# Altium PCB RightSideLeftBox.PcbDoc
Units mil, origin at the board's own origin, x right, y up, seen from the top; angles counter-clockwise.
Board outline 11700 x 6800 mil, 4 copper layers (Top Layer, Layer 1, Layer 2, Bottom Layer), stack 23.756 mil thick; 51 components, 69 nets, 272 pads, 13 vias.
Unrouted connection lines stored in the file: 36.
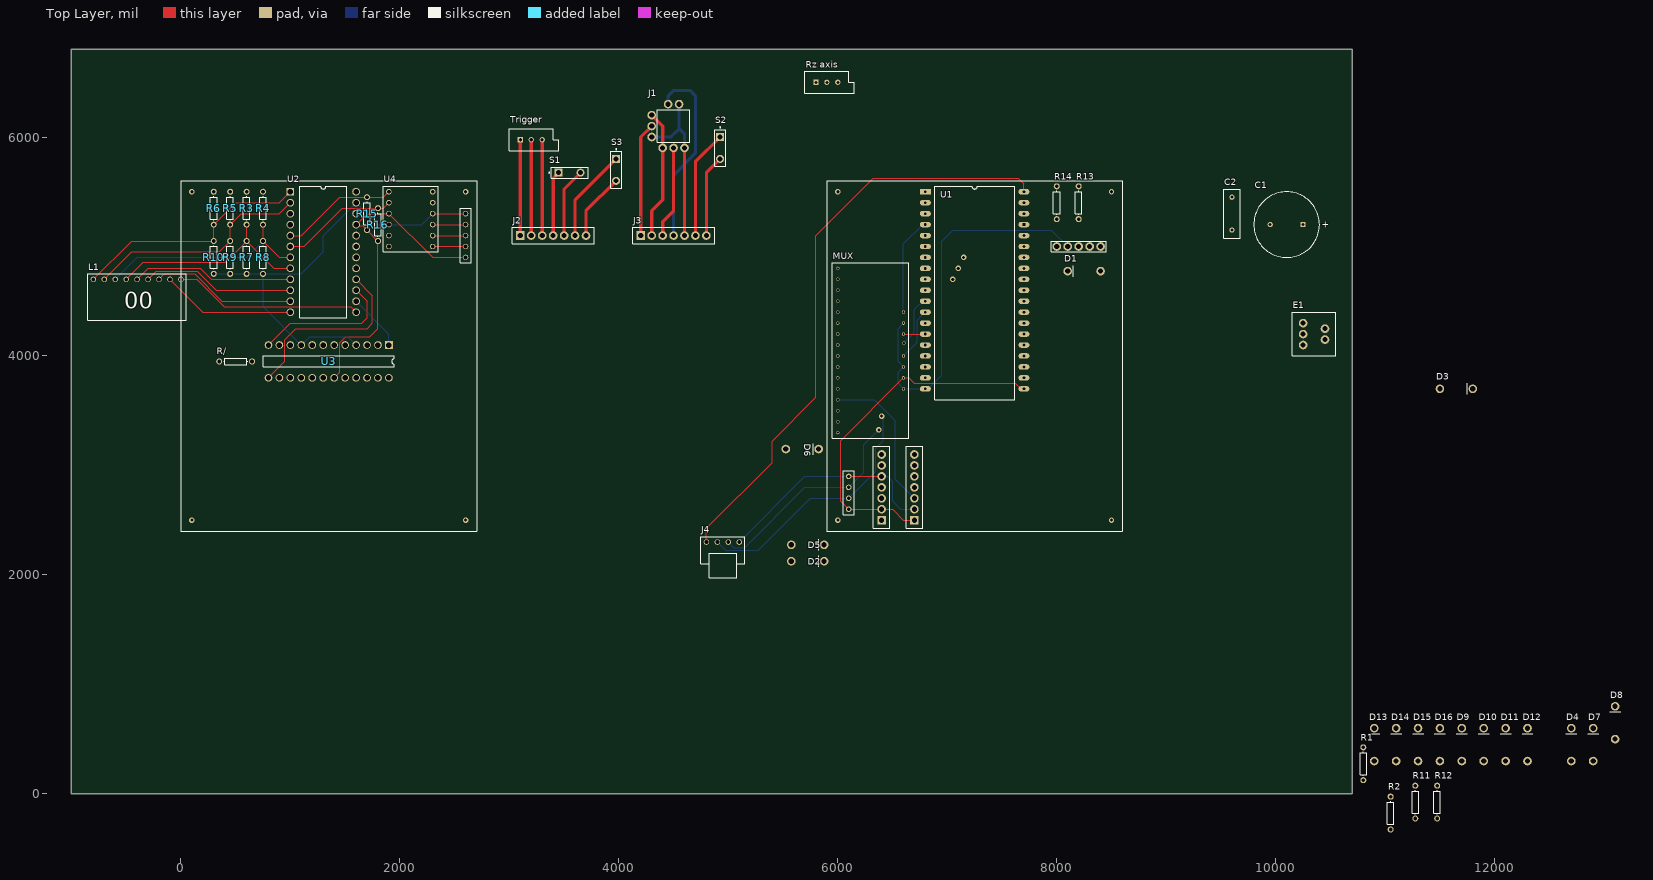
[diagram p0: Top Layer view]
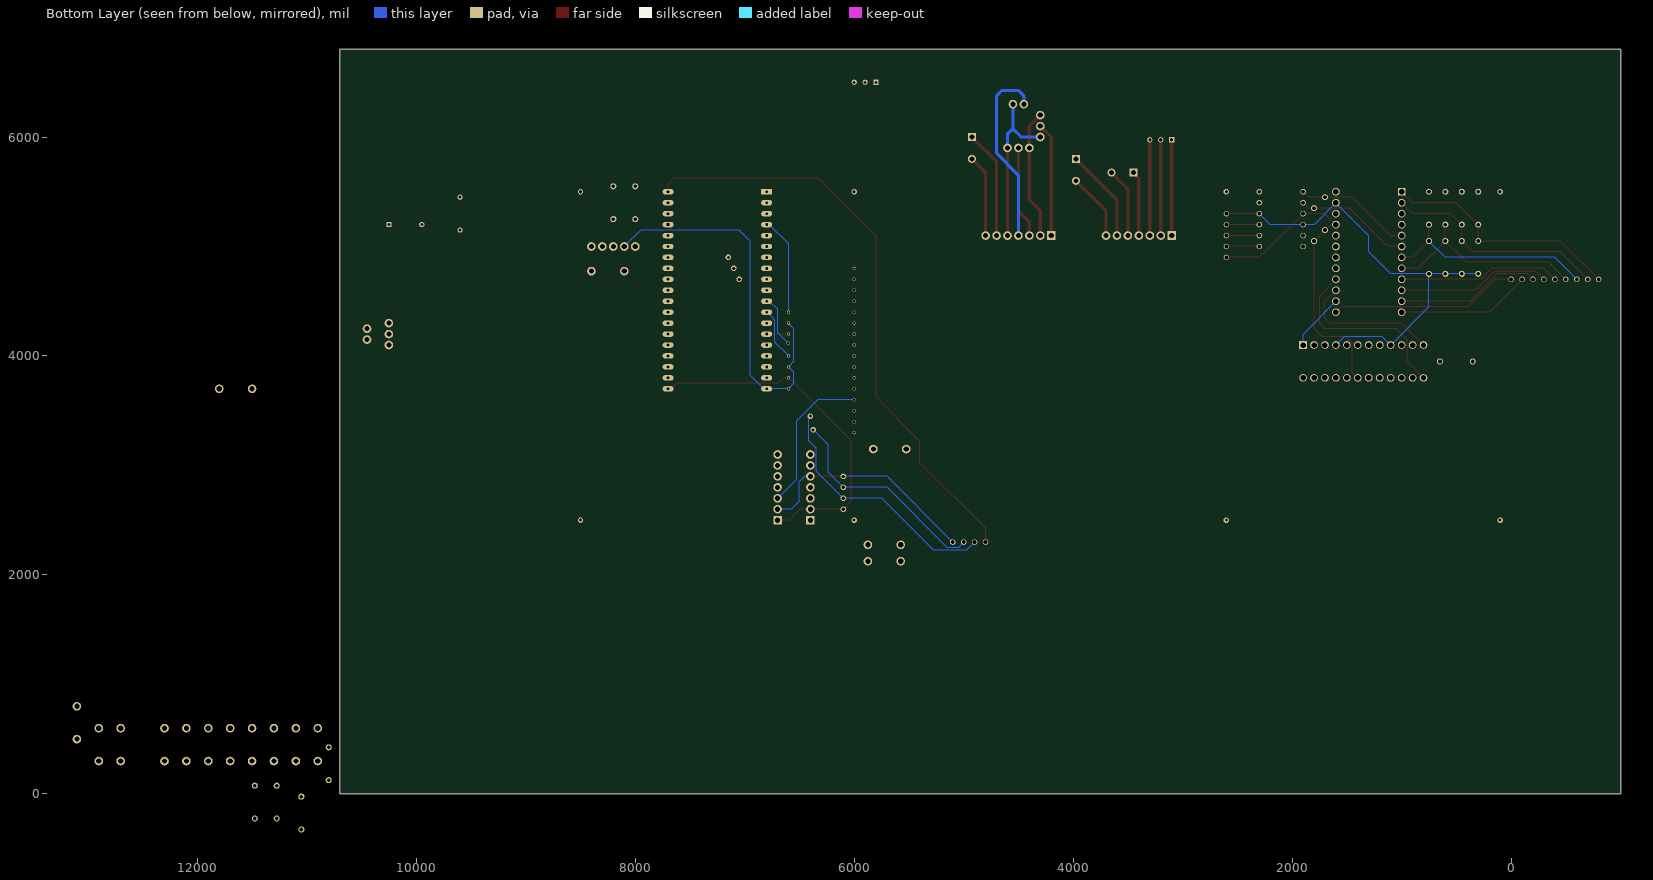
[diagram p1: Bottom Layer view, seen from below]
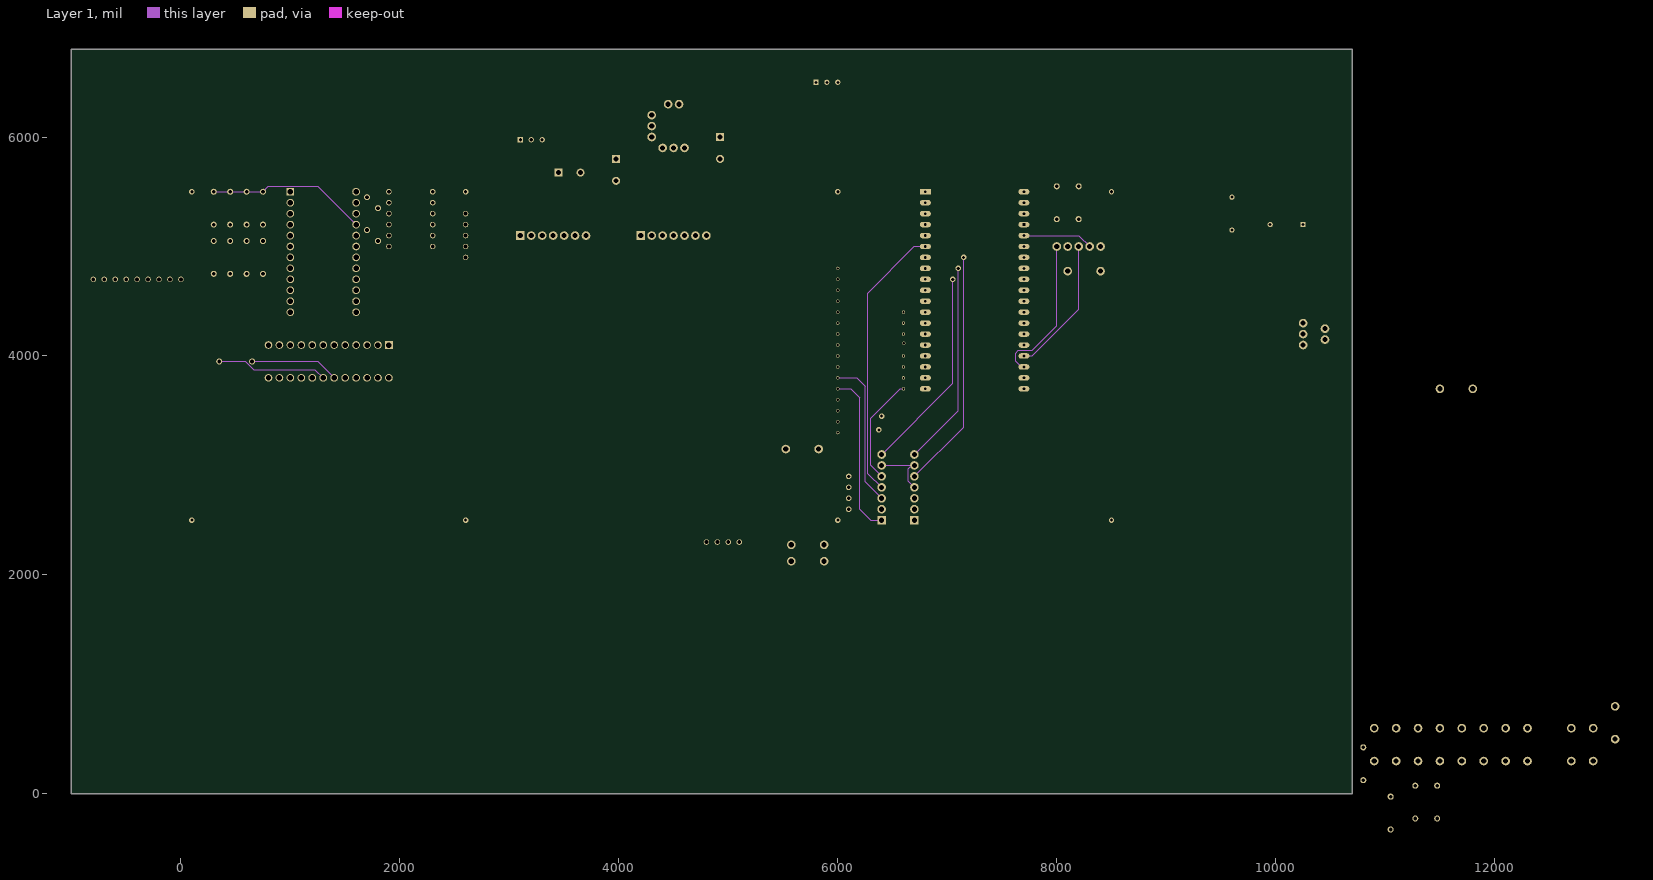
[diagram p2: Layer 1]
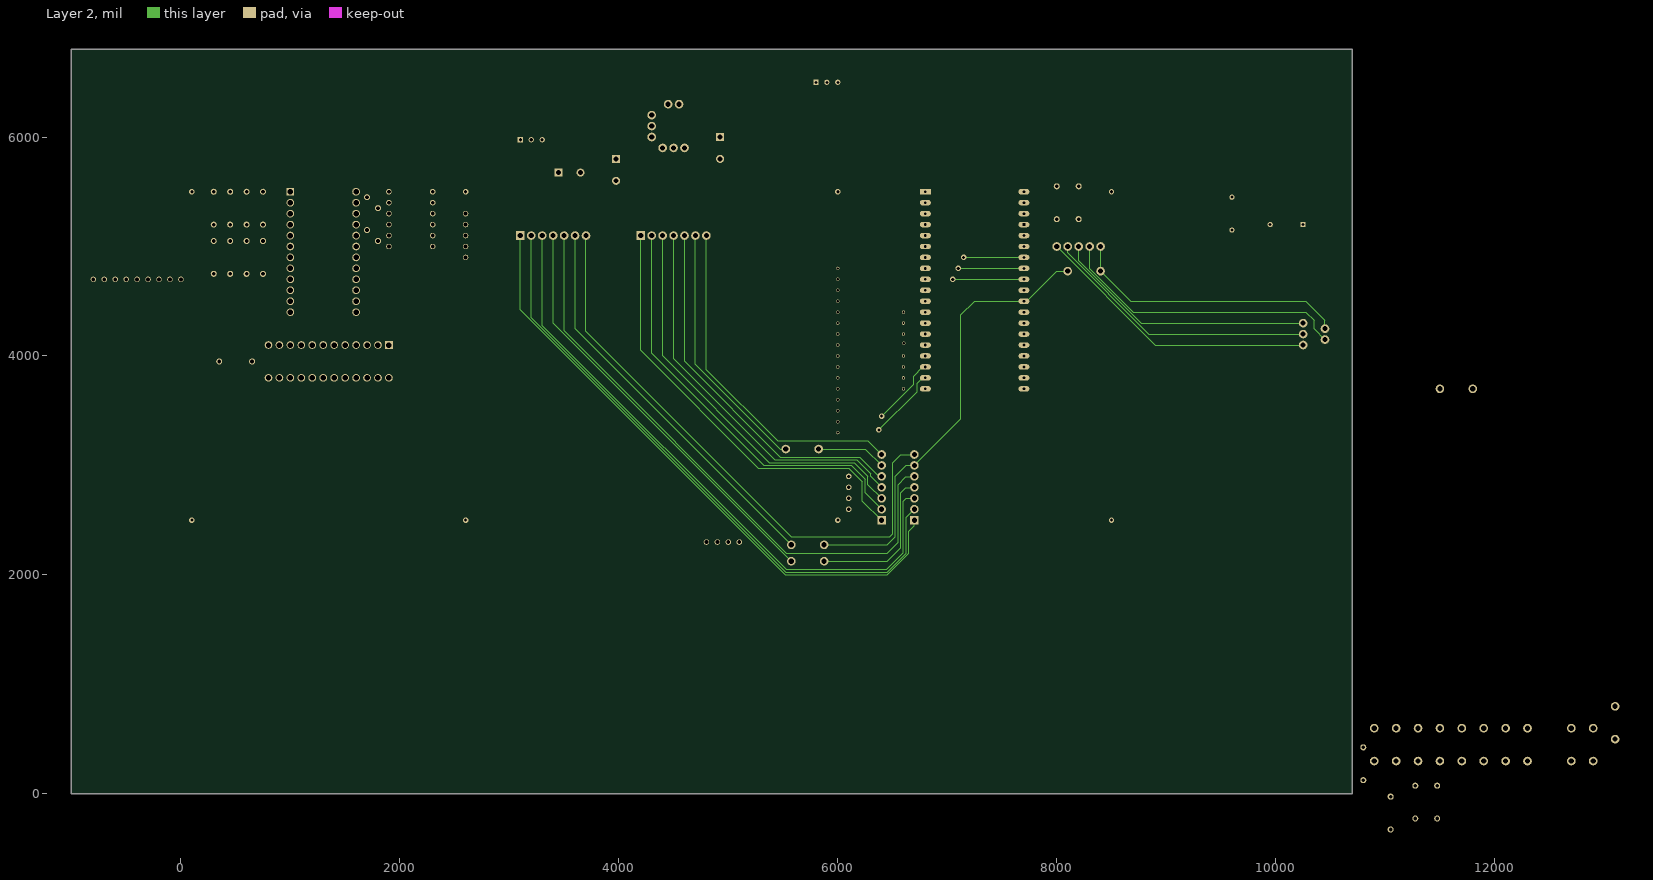
[diagram p3: Layer 2]

## Layer stack, top to bottom
Top Solder: solder mask 0.4, Solder Resist, Dk 3.5
Top Layer: signal copper 1.4
Dielectric 2: prepreg 2.8, PP-006, Dk 4.1
Layer 1: signal copper 1.378
Dielectric 1: dielectric 12.6, FR-4, Dk 4.8
Layer 2: signal copper 1.378
Dielectric 3: prepreg 2.8, PP-006, Dk 4.1
Bottom Layer: signal copper 1.4
Bottom Solder: solder mask 0.4, Solder Resist, Dk 3.5

## Board outline
-1000,0 10700,0 10700,6800 -1000,6800

## Design rules (kind name [scope] priority, off if disabled: settings)
Clearance [All] p1: gap=10 ignorepadtopadclearanceinfootprint=FALSE except(0: Arc-Hole Track-Hole SMDPad-Hole THPad-Hole Via-Hole Fill-Hole Poly-Hole Region-Hole Text-Hole)
PolygonConnect [All] p1: connectstyle=Relief reliefconductorwidth=10 reliefentries=4 polygonreliefangle="90 Angle" airgapwidth=10
RoomDefinition RightSide [InComponentClass('RightSide')] p1 off: confinementstyle=ConfineIn formatcopy=TRUE lockcomponents=FALSE outline -1000,-1000 -700,-1000 -700,-800 -1000,-800
RoutingVias [All] p1: holewidth=28 width=50 viastyle="Through Hole" minholewidth=28 minwidth=50 maxholewidth=28 maxwidth=50
SolderMaskExpansion [All] p1: expansion=4 istentingtop=FALSE
Width [All] p1: maxlimit=100 minlimit=10 preferedwidth=30 minimp=50.000000 maximp=50.000000 favimp=50.000000
30 further rules are at their usual default settings.

## Components (designator, comment, footprint, x,y, rotation, side; value= is the part's Value field where it differs from the comment)
C1 "Cap Pol1" RB7.6-15 10100,5200 r0 top
C2 "Cap" RAD-0.3 9600,5300 r90 top value=100pF
D1 "Diode" Diode_300mil 8400,4775 r180 top
D2 "Diode" Diode_300mil 5575,2125 r0 top
D3 "Diode" Diode_300mil 11500,3700 r0 top
D4 "Diode" Diode_300mil 12700,300 r90 top
D5 "Diode" Diode_300mil 5575,2275 r0 top
D6 "Diode" Diode_300mil 5525,3150 r0 top
D7 "Diode" Diode_300mil 12900,300 r90 top
D8 "Diode" Diode_300mil 13100,500 r90 top
D9 "Diode" Diode_300mil 11700,300 r90 top
D10 "Diode" Diode_300mil 11900,300 r90 top
D11 "Diode" Diode_300mil 12100,300 r90 top
D12 "Diode" Diode_300mil 12300,300 r90 top
D13 "Diode" Diode_300mil 10900,300 r90 top
D14 "Diode" Diode_300mil 11100,300 r90 top
D15 "Diode" Diode_300mil 11300,300 r90 top
D16 "Diode" Diode_300mil 11500,300 r90 top
E1 "EC11" Encoder 10250,4200 r270 top
J1 "Mini joystick" MiniJoyStick 4500,6100 r0 top
J2 "Header7Pin" Header7Pin 3100,5100 r90 top
J3 "Header7Pin" Header7Pin 4200,5100 r90 top
J4 "USB Connector" USB-B 4800,2300 r0 top
L1 "LCD Display" "LCD DISPLAY" -800,4700 r0 top
MUX "CD74HC4067" CD74HC4067 6000,4800 r0 top locked
R1 "Res1" AXIAL-0.3 10800,275 r90 top value=1K
R2 "Res1" AXIAL-0.3 11050,-175 r90 top value=1K
R3 "Res1" AXIAL-0.3 600,5350 r90 top value=10K
R4 "Res1" AXIAL-0.3 750,5350 r90 top value=10K
R5 "Res1" AXIAL-0.3 450,5350 r90 top locked value=10K
R6 "Res1" AXIAL-0.3 300,5350 r90 top locked value=10K
R7 "Res1" AXIAL-0.3 600,4900 r90 top value=10K
R8 "Res1" AXIAL-0.3 750,4900 r90 top value=10K
R9 "Res1" AXIAL-0.3 450,4900 r90 top locked value=10K
R10 "Res1" AXIAL-0.3 300,4900 r90 top locked value=10K
R11 "Res1" AXIAL-0.3 11275,-75 r90 top value=1K
R12 "Res1" AXIAL-0.3 11475,-75 r90 top value=1K
R13 "Res1" AXIAL-0.3 8200,5400 r90 top value=1K
R14 "Res1" AXIAL-0.3 8000,5400 r90 top value=1K
R15 "Res1" AXIAL-0.3 1700,5300 r270 top locked value=1K
R16 "Res1" AXIAL-0.3 1800,5200 r270 top locked value=1K
R/ "Res1" AXIAL-0.3 500,3950 r0 top value=9.53K
"Rz axis" "RPot" VR5 5900,6500 r0 top value=1K
S1 "SW-PB" SPST-2 3550,5675 r0 top
S2 "SW-PB" SPST-2 4925,5900 r270 top
S3 "SW-PB" SPST-2 3975,5700 r270 top
Trigger "RPot" VR5 3200,5975 r0 top value=1K
U1 "NodeMCU-32S" DIP38 6800,5500 r0 top locked
U2 "Pro Micro" "DIP24 x 600mil" 1000,5500 r0 top locked
U3 "MAX7219" "DIP24 x 300mil" 1900,4100 r270 top locked
U4 "LevelShifter" LevelShifter 1900,5000 r90 top locked

## Footprints (in the part's own frame and the unit in brackets; to place one, negate y for a bottom-side part, rotate by r counter-clockwise, add the part's x,y. Pads: shape width x height; smd on the part's side, far side on the other; paste and mask are expansions set on the pad)
AXIAL-0.3 [mm] "Axial Device, Thru-Hole; 2 Leads; 0.3 in Pin Spacing"
  round 1.4 hole 0.85: 1(-3.81,0) 2(3.81,0)
  silkscreen extent -2.77,-0.76 2.77,0.76
CD74HC4067 [mil] "MUX"
  round 30 hole 20: 1(600,-400) 2(0,-800) 3(0,-900) 4(0,-1000) 5(0,-1100) 6(0,-1200) 7(0,-1300) 8(0,-1400) 9(0,-1500) 10(600,-800) 11(602.44,-683.24) 12(600,-1100) 13(600,-500) 14(600,-600) 15(600,-900) 16(0,0) 17(0,-100) 18(0,-200) 19(0,-300) 20(0,-400) 21(0,-500) 22(0,-600) 23(0,-700) 24(600,-1000)
  silkscreen extent -50,-1550 650,50
Diode_300mil [mm]
  round 2 hole 1.2: 1(0,0) 2(7.62,0)
  silkscreen extent 6.35,-1.27 6.35,1.27
"DIP24 x 300mil" [mil]
  rect 70x70 hole 50: 1(0,0)
  round 70 hole 50: 2(0,-100) 3(0,-200) 4(0,-300) 5(0,-400) 6(0,-500) 7(0,-600) 8(0,-700) 9(0,-800) 10(0,-900) 11(0,-1000) 12(0,-1100) 13(300,-1100) 14(300,-1000) 15(300,-900) 16(300,-800) 17(300,-700) 18(300,-600) 19(300,-500) 20(300,-400) 21(300,-300) 22(300,-200) 23(300,-100) 24(300,0)
  silkscreen extent 100,-1150 200,50
"DIP24 x 600mil" [mil]
  rect 70x70 hole 50: 1(0,0)
  round 70 hole 50: 2(0,-100) 3(0,-200) 4(0,-300) 5(0,-400) 6(0,-500) 7(0,-600) 8(0,-700) 9(0,-800) 10(0,-900) 11(0,-1000) 12(0,-1100) 13(600,-1100) 14(600,-1000) 15(600,-900) 16(600,-800) 17(600,-700) 18(600,-600) 19(600,-500) 20(600,-400) 21(600,-300) 22(600,-200) 23(600,-100) 24(600,0)
  silkscreen extent 85,-1150 515,50
DIP38 [mil]
  rect 100x50 hole 25: 1(0,0)
  oval 100x50 hole 25: 2(0,-100) 3(0,-200) 4(0,-300) 5(0,-400) 6(0,-500) 7(0,-600) 8(0,-700) 9(0,-800) 10(0,-900) 11(0,-1000) 12(0,-1100) 13(0,-1200) 14(0,-1300) 15(0,-1400) 16(0,-1500) 17(0,-1600) 18(0,-1700) 19(0,-1800) 20(900,-1800) 21(900,-1700) 22(900,-1600) 23(900,-1500) 24(900,-1400) 25(900,-1300) 26(900,-1200) 27(900,-1100) 28(900,-1000) 29(900,-900) 30(900,-800) 31(900,-700) 32(900,-600) 33(900,-500) 34(900,-400) 36(900,-200) 37(900,-100) 38(900,0)
  oval 100x50 hole 25 square: 35(900,-300)
  silkscreen extent 85,-1900 815,50
Encoder [mm]
  round 2 hole 1.2: 0(-2.54,0) 1(0,0) 2(2.54,0) 3(-1.27,5.08) 4(1.27,5.08)
  silkscreen extent -5.08,-2.54 5.08,7.62
Header7Pin [mm]
  rect 2x2 hole 1.2: 1(0,0)
  round 2 hole 1.2: 2(0,-2.54) 3(0,-5.08) 4(0,-7.62) 5(0,-10.16) 6(0,-12.7) 7(0,-15.24)
  silkscreen extent -1.91,-17.14 1.91,1.91
"LCD DISPLAY" [mil]
  round 50 hole 35: 1(0,0) 2(100,0) 3(200,0) 4(300,0) 5(400,0) 6(500,0) 7(600,0) 8(700,0) 9(800,0)
  silkscreen extent -50,-375 850,50
LevelShifter [mil]
  round 50 hole 35: 1(0,0) 2(100,0) 3(200,0) 4(300,0) 5(400,0) 6(500,0) 7(0,-400) 8(100,-400) 9(200,-400) 10(300,-400) 11(400,-400) 12(500,-400)
  silkscreen extent -50,-450 550,50
MiniJoyStick [mm]
  round 2 hole 1.2: 1(-1.27,5.08) 2(1.27,5.08) 3(-5.08,2.54) 4(-5.08,0) 5(-5.08,-2.54) 6(-2.54,-5.08) 7(0,-5.08) 8(2.54,-5.08)
  silkscreen extent -3.81,-3.81 3.81,3.81
RAD-0.3 [mm] "Radial Cap, Thru-Hole; 2 Leads; 0.3 in Pin Spacing"
  round 1.2 hole 0.7: 1(-3.81,0) 2(3.81,0)
  silkscreen extent -5.71,-1.91 5.71,1.91
RB7.6-15 [mm] "Polarized Capacitor (Radial); 2 Leads"
  rect 1.2x1.2 hole 0.7: 1(3.81,0)
  round 1.2 hole 0.7: 2(-3.81,0)
  silkscreen extent -7.62,-7.62 7.62,7.62
SPST-2 [mm] "Switch; 2 Leads"
  rect 1.85x1.85 hole 1.1: 1(-2.54,0)
  round 1.85 hole 1.1: 2(2.54,0)
  silkscreen extent -4.89,-1.27 4.28,1.27
USB-B [mil]
  round 50 hole 35: 1(300,0) 2(200,0) 3(100,0) 4(0,0)
  silkscreen extent -50,-325 350,50
VR5 [mm] "Thru-Hole; 3 Leads"
  rect 1.2x1.2 hole 0.7: 1(-2.54,0)
  round 1.2 hole 0.7: 2(0,0) 3(2.54,0)
  silkscreen extent -5.08,-2.54 6.35,2.54

## Part data
C1: "Polarized Capacitor (Radial)", LatestRevisionDate=17-Jul-2002, LatestRevisionNote="Re-released for DXP Platform.", PackageDescription="Polarized Capacitor (Radial); 2 Leads", PackageReference=RB7.6-15, Published=8-Jun-2000, Publisher="Altium Limited"
C2: "Capacitor", LatestRevisionDate=17-Jul-2002, LatestRevisionNote="Re-released for DXP Platform.", PackageDescription="Radial Cap, Thru-Hole; 2 Leads; 0.3 in Pin Spacing", PackageReference=RAD-0.3, Published=8-Jun-2000, Publisher="Altium Limited"
D1 D2 D3 D4 D5 D6 D7 D8 D9 D10 D11 D12 D13 D14 D15 D16: "Default Diode", Code_JEDEC=DO-214-AB, LatestRevisionDate=17-Jul-2002, LatestRevisionNote="Re-released for DXP Platform.", PackageDescription="DO-214-AB/SMC; 2 C-Bend Leads; Body 7.9 x 5.9 mm, inc. leads (LxW)", PackageReference=SMC, PackageVersion=Sep-1996, Published=8-Jun-2000, Publisher="Altium Limited"
E1: "Rot Encoder / C GND / Pull up A,B"
MUX: "Analog Multiplexer"
R1 R2 R3 R4 R5 R6 R7 R8 R9 R10 R11 R12 R13 R14 R15 R16 R/: "Resistor", LatestRevisionDate=17-Jul-2002, LatestRevisionNote="Re-released for DXP Platform.", PackageDescription="Axial Device, Thru-Hole; 2 Leads; 0.3 in Pin Spacing", PackageReference=AXIAL-0.3, Published=8-Jun-2000, Publisher="Altium Limited"
"Rz axis" Trigger: "Potentiometer", LatestRevisionDate=17-Jul-2002, LatestRevisionNote="Re-released for DXP Platform.", PackageDescription="Variable Resistor, Thru-Hole; 3 Leads", PackageReference=VR5, Published=8-Jun-2000, Publisher="Altium Limited", Set Position=0.5, Sim Note="Enter the Resistance value and the set point into parameter fields."
S1 S2 S3: "Switch", LatestRevisionDate=17-Jul-2002, LatestRevisionNote="Re-released for DXP Platform.", PackageDescription="Switch; 2 Leads", PackageReference=SPST-2, Published=24-Mar-1999, Publisher="Altium Limited"
U3: "https://datasheets.maximintegrated.com/en/ds/MAX7219-MAX7221.pdf"

## Free pads (board coordinates)
  round 50 hole 35: 1(2600,5300) 3(2600,4900) 3(2600,5000) 3(2600,5100) 12(2600,5200)
  round 50 hole 30: ""(6100,2600) ""(6100,2700) ""(6100,2800) ""(6100,2900)
  rect 78.74x78.74 hole 47.24: ""(6400,2500) ""(6700,2500)
  round 78.74 hole 47.24: ""(6400,2600) ""(6400,2700) ""(6400,2800) ""(6400,2900) ""(6400,3000) ""(6400,3100) ""(6700,2600) ""(6700,2700) ""(6700,2800) ""(6700,2900) ""(6700,3000) ""(6700,3100) ""(8000,5000) ""(8100,5000) ""(8200,5000) ""(8300,5000) ""(8400,5000)

## Via types
v1: diameter 50, hole 28, Top Layer to Bottom Layer, 13 vias

## Nets (pads, with @x,y where several pads share a name; then routed paths per layer and width w, separated by ;. In a path a pad name is that pad's centre, name@x,y a point inside that pad or via, vN(x,y) a via of type N, cw(c..) or ccw(c..) an arc to the next point about the centre after c; other vN are vias at no path point)
+3.3: "Rz axis.2" J1.3 J1.6 J2.1 J3.2 MUX.24 pad.12 pad.@6100,2600 pad.@6400,2600 pad.@6700,2500 R13.2 R14.2 Trigger.1 U1.20 U4.9 | length 15085.3
  Top Layer w10: U4.9 pad.12 ; pad.@6700,2500 6600,2500 6500,2600 6400,2600 6100,2600 6025,2675 6025,3225 MUX.24 6650,3800 6698.09,3751.91 7623.09,3751.91 7675,3700 U1.20
  Top Layer w30: J2.1 Trigger.1 ; J3.2 4300,5325 4400,5425 J1.6 4400,6100 J1.3
  Layer 2 w10: J2.1 3100,4421.72 5521.72,2000 6453.28,2000 6650,2196.72 6650,2400 6700,2450 pad.@6700,2500 ; J3.2 4300,4025 5325,3000 6125,3000 6250,2875 6250,2750 pad.@6400,2600
+5: J4.4 pad.3@2600,4900 R1.1 R2.1 R3.2 R4.2 R5.2 R6.2 R11.1 R12.1 R15.2 R16.2 R/.2 U1.38 U2.21 U3.19 U4.4 | length 10719.4
  Top Layer w10: U3.19 1450,3850 1450,4079.29 1450,4120.71 1479.29,4150 1504.29,4175 1725,4175 1800,4250 R16.2 R15.2 1661.48,5188.52 1611.48,5188.52 U2.21 1700,5300 U4.4 2300,4900 pad.3@2600,4900 ; J4.4 4800,2425 5400,3025 5400,3222.49 5800,3622.49 5800,5100 6325,5625 7650,5625 7700,5575 U1.38
  Layer 1 w10: R6.2 R5.2 R3.2 R4.2 800,5550 1250,5550 U2.21 ; R/.2 1250,3950 U3.19
+A0: E1.4 pad.@8300,5000 R1.2 U1.34 | length 3305.7
  Layer 1 w10: U1.34 8200,5100 pad.@8300,5000
  Layer 2 w10: pad.@8300,5000 8300,4798.11 8698.11,4400 10275,4400 10350,4325 10350,4250 E1.4
+A1: J2.5 pad.@6700,2900 R2.2 S1.2 U1.32 | length 8882.9
  Top Layer w30: J2.5 3500,5525 S1.2
  Layer 1 w10: pad.@6700,2900 7150,3350 v1(7150,4900)
  Layer 2 w10: J2.5 3500,4228.28 5528.28,2200 6450,2200 6550,2300 6550,2825 6620.63,2895.63 6695.63,2895.63 pad.@6700,2900 ; v1(7150,4900) U1.32
+A2: J2.7 pad.@6700,3100 R11.2 S3.2 U1.31 | length 8422.7
  Top Layer w30: J2.7 3700,5325 S3.2
  Layer 1 w10: pad.@6700,3100 7100,3500 v1(7100,4800)
  Layer 2 w10: J2.7 3700,4225 5575,2350 6475,2350 6500,2375 6500,3025 6575,3100 pad.@6700,3100 ; v1(7100,4800) U1.31
+A3: J3.7 pad.@6400,3100 R12.2 S2.2 U1.30 | length 6417
  Top Layer w30: J3.7 4800,5675 S2.2
  Layer 1 w10: pad.@6400,3100 7050,3750 v1(7050,4700)
  Layer 2 w10: J3.7 4800,3875 5450,3225 6275,3225 6350,3150 pad.@6400,3100 ; v1(7050,4700) U1.30
-A0: D1.1 E1.3 pad.@8400,5000 | length 2536.4
  Layer 2 w10: pad.@8400,5000 D1.1 8675,4500 10275,4500 10450,4325 E1.3
-A1: D2.1 J2.4 S1.1 | length 4471.6
  Top Layer w30: J2.4 3400,5625 S1.1
  Layer 2 w10: J2.4 3400,4300 D2.1
-A2: D5.1 J2.6 S3.1 | length 4498.4
  Top Layer w30: J2.6 3600,5425 S3.1
  Layer 2 w10: J2.6 3600,4250 D5.1
-A3: D6.1 J3.6 S2.1 | length 3314.2
  Top Layer w30: J3.6 4700,5775 S2.1
  Layer 2 w10: J3.6 4700,3925 5475,3150 D6.1
-B0: D3.1
-B1: D4.1
-B2: D7.1
-B3: D8.1
-C0: D9.1
-C1: D10.1
-C2: D11.1
-C3: D12.1
-D0: D13.1
-D1: D14.1
-D2: D15.1
-D3: D16.1
EC_A: C2.2 E1.0 pad.@8200,5000 R13.1 U1.23 | length 3667.2
  Layer 1 w10: U1.23 7775,4000 8200,4425 pad.@8200,5000
  Layer 2 w10: pad.@8200,5000 8200,4869.82 8769.82,4300 E1.0
"EC_B (Int)": C1.1 E1.2 pad.@8000,5000 R14.1 U1.22 | length 3997.1
  Layer 1 w10: U1.22 7675,3900 7625,3950 7625,4025 7650,4050 7775,4050 8000,4275 pad.@8000,5000
  Layer 2 w10: pad.@8000,5000 8900,4100 E1.2
GND: "Rz axis.1" C1.2 C2.1 E1.1 J1.2 J1.5 J1.8 J2.2 J3.5 J4.1 MUX.12 MUX.13 MUX.15 pad.1 pad.@6100,2900 pad.@6400,2900 pad.@6700,2600 pad.@8100,5000 R7.1 R8.1 R9.1 R10.1 Trigger.2 U1.19 U2.23 U3.4 U3.9 U4.3 U4.10 | length 24680
  Top Layer w10: U4.10 pad.1 ; pad.@6100,2900 pad.@6400,2900
  Top Layer w30: J2.2 Trigger.2 ; J3.5 J1.8
  Layer 1 w10: pad.@6400,2900 6300,3000 6300,3431.57 6568.43,3700 MUX.12
  Layer 2 w10: J2.2 3200,4350 5525,2025 6450,2025 6625,2200 6625,2525 pad.@6700,2600 ; J3.5 4600,3950 5475,3075 6200,3075 6361.85,2913.15 6386.85,2913.15 pad.@6400,2900 ; pad.@8100,5000 8100,4941.54 8841.54,4200 E1.1
  Bottom Layer w10: R10.1 R9.1 R7.1 R8.1 ; U3.4 1525,4175 1175,4175 U3.9 750,4450 R8.1 ; U4.10 2200,5200 U4.3 1800,5200 U2.23 1300,5100 1300,4950 1100,4750 R8.1 ; J4.1 5700,2900 pad.@6100,2900 ; pad.@6400,2900 6450,2900 6500,2850 6500,2675 6575,2600 pad.@6700,2600 ; MUX.13 6550,4250 6550,3950 MUX.15 6550,3850 6550,3750 MUX.12 U1.19 6825,3700 6950,3825 6950,5050 7050,5150 7950,5150 pad.@8100,5000
  Bottom Layer w30: J1.5 4475,6000 4550,6075 ; J1.2 4550,6075 ; J1.8 4600,6025 4550,6075
MJS_Button: J1.1 J3.4 pad.@6400,2800 U1.6 | length 7778.4
  Layer 1 w10: pad.@6400,2800 6275,2925 6275,4575 6700,5000 U1.6
  Layer 2 w10: J3.4 4500,3975 5425,3050 6175,3050 6300,2925 6300,2900 pad.@6400,2800
  Bottom Layer w30: J1.1 4450,6375 4500,6425 4650,6425 4700,6375 4700,5850 4500,5650 J3.4
MUX_C0: MUX.9
MUX_C1: MUX.8
MUX_C2: "Rz axis.3" MUX.7
MUX_C3: J2.3 MUX.6 pad.@6700,2700 Trigger.3 | length 7949.4
  Top Layer w30: J2.3 Trigger.3
  Layer 2 w10: J2.3 3300,4278.28 5528.28,2050 6446.72,2050 6600,2203.28 6600,2675 6625,2700 pad.@6700,2700
  Bottom Layer w10: MUX.6 6331.57,3600 6525,3406.57 6525,2875 pad.@6700,2700
MUX_C4: J1.4 J3.1 MUX.5 pad.@6400,2500 | length 6528.9
  Top Layer w30: J3.1 4200,6000 J1.4
  Layer 1 w10: MUX.5 6117.16,3700 6200,3617.16 6200,2600 6300,2500 pad.@6400,2500
  Layer 2 w10: J3.1 4200,4050 5275,2975 6100,2975 6225,2850 6225,2675 pad.@6400,2500
MUX_C5: J1.7 J3.3 MUX.4 pad.@6400,2700 | length 5892
  Top Layer w30: J3.3 4400,5225 4500,5325 J1.7
  Layer 1 w10: MUX.4 6175,3800 6250,3725 6250,2850 pad.@6400,2700
  Layer 2 w10: J3.3 4400,4000 5375,3025 6150,3025 6275,2900 6275,2825 pad.@6400,2700
NetL1_1: L1.1 R6.1 R10.2 U2.1 | length 2219.2
  Top Layer w10: L1.1 -450,5050 R10.2 R6.1 500,5400 900,5400 U2.1
NetL1_2: L1.2 R5.1 R9.2 U2.2 | length 2077.8
  Top Layer w10: L1.2 -450,4950 350,4950 R9.2 R5.1 550,5300 900,5300 U2.2
NetL1_3: L1.3 R4.1 R8.2 U2.7 | length 1957.1
  Top Layer w10: R4.1 R8.2 900,4900 U2.7
  Bottom Layer w10: L1.3 -400,4900 600,4900 R8.2
NetL1_4: L1.4 R3.1 R7.2 U2.8 | length 1898.5
  Top Layer w10: L1.4 -345.49,4854.51 404.51,4854.51 R7.2 ; R3.1 R7.2 ; U2.8 850,4800 R7.2
NetL1_5: L1.5 U2.9 | length 1482.8
  Top Layer w10: L1.5 -300,4800 175,4800 275,4700 U2.9
NetL1_6: L1.6 U2.10 | length 1403.6
  Top Layer w10: L1.6 -225,4775 150,4775 325,4600 U2.10
NetL1_7: L1.7 U2.11 | length 1324.3
  Top Layer w10: L1.7 -150,4750 125,4750 375,4500 U2.11
NetL1_8: L1.8 U2.12 | length 1224.3
  Top Layer w10: L1.8 200,4400 U2.12
NetL1_9: L1.9 U2.13 | length 1724.3
  Top Layer w10: L1.9 146.72,4700 396.72,4450 1550,4450 U2.13
NetL2_1: U3.11
NetL2_3: U3.2
NetL2_11: U3.17
NetL2_12: U3.15
NetL2_13: U3.21
NetL2_14: U3.23
NetL2_15: U3.20
NetL2_16: U3.16
NetL2_17: U3.14
NetL2_18: U3.22
NetMUX_1: MUX.1 U1.4 | length 897.5
  Bottom Layer w10: MUX.1 6600,5025 6775,5200 U1.4
NetMUX_10: MUX.10 U1.12 | length 491
  Bottom Layer w10: MUX.10 6725,4125 6725,4328.09 6767.67,4370.76 6767.67,4381.52 6786.15,4400 U1.12
NetMUX_11: MUX.11 U1.11 | length 479.7
  Bottom Layer w10: MUX.11 6700,4214.33 6700,4425 6775,4500 U1.11
NetMUX_14: MUX.14 U1.14 | length 200
  Top Layer w10: MUX.14 U1.14
NetR/_1: R/.1 U3.18 | length 1012.1
  Layer 1 w10: R/.1 589.81,3950 663.39,3876.42 1223.58,3876.42 U3.18
NetU2_14: U2.14 U3.1 | length 524.3
  Bottom Layer w10: U2.14 1900,4200 U3.1
NetU2_15: U2.15 U3.12 | length 1295
  Top Layer w10: U3.12 1000,4300 1650,4300 1700,4350 1700,4500 U2.15
NetU2_16: U2.16 U3.13 | length 1736.4
  Top Layer w10: U3.13 950,3950 950,4150 1050,4250 1700,4250 1750,4300 1750,4550 U2.16
R0: D1.2 D2.2 D5.2 D6.2 pad.@6400,3000 pad.@6700,2800 pad.@6700,3000 U1.28 | length 6714.1
  Layer 1 w10: pad.@6400,3000 pad.@6675,3000 ; pad.@6695.63,2995.63 pad.@6700,3000 ; pad.@6695.63,3000 pad.@6675,3000 ; pad.@6700,2800 6645.63,2854.37 6645.63,2970.63 6661.85,2986.85 6668.25,2986.85 6675,2993.6 pad.@6675,3000
  Layer 2 w10: D6.2 6250,3150 pad.@6400,3000 ; D2.2 6450,2125 6575,2250 6575,2750 6620.63,2795.63 6695.63,2795.63 pad.@6700,2800 ; D5.2 6450,2275 6525,2350 6525,2900 6625,3000 6700,3000 7125,3425 7125,4375 7250,4500 7685.82,4500 U1.28 7725,4500 8000,4775 D1.2
R1: D3.2 D4.2 D7.2 D8.2 U1.27
R2: D9.2 D10.2 D11.2 D12.2 U1.26
R3: D13.2 D14.2 D15.2 D16.2 U1.25
SCL: J4.2 pad.@6100,2800 U1.18 | length 2653.1
  Layer 2 w10: v1(6375,3325) 6725,3675 6725,3750 6775,3800 U1.18
  Bottom Layer w10: J4.2 5050,2250 5150,2250 5700,2800 6100,2800 6237.5,2937.5 6237.5,3187.5 v1(6375,3325)
SCL_ESP_Micro_HV: R16.1 U2.6 U4.5 | length 1065.7
  Top Layer w10: U2.6 1125,5000 1475,5350 1850,5350 U4.5
SCL_ESP_Micro_LV: pad.3@2600,5100 U1.8 U4.8 | length 300
  Top Layer w10: U4.8 pad.3@2600,5100
SDA: J4.3 pad.@6100,2700 U1.17 | length 2944.8
  Layer 2 w10: v1(6400,3450) 6691.72,3741.72 6691.72,3816.72 6775,3900 U1.17
  Bottom Layer w10: J4.3 4975,2225 5275,2225 5750,2700 6100,2700 6345.63,2945.63 6345.63,3155.63 6415,3225 6415,3424.18 6400,3439.18 v1(6400,3450)
SDA_ESP_Micro_HV: R15.1 U2.5 U4.6 | length 1065.7
  Top Layer w10: U2.5 1100,5100 1450,5450 1850,5450 U4.6
SDA_ESP_Micro_LV: pad.3@2600,5000 U1.7 U4.7 | length 300
  Top Layer w10: U4.7 pad.3@2600,5000
pads on no net: MUX.2 MUX.3 MUX.16 MUX.17 MUX.18 MUX.19 MUX.20 MUX.21 MUX.22 MUX.23 U1.1 U1.2 U1.3 U1.5 U1.9 U1.10 U1.13 U1.15 U1.16 U1.21 U1.24 U1.29 U1.33 U1.35 U1.36 U1.37 U2.3 U2.4 U2.17 U2.18 U2.19 U2.20 U2.22 U2.24 U3.3 U3.5 U3.6 U3.7 U3.8 U3.10 U3.24 U4.1 U4.2 U4.11 U4.12
copper on no net:
  other v1: 100,2500 2600,2500 6000,2500 8500,2500 100,5500 2600,5500 6000,5500 8500,5500

## Silkscreen, mask and mechanical layers (free items; w line width, h text height)
Top Overlay:
  lines w10: 0,2400 0,5600 2700,5600 2700,2400 0,2400 ; 2550,4850 2550,5350 2650,5350 2650,4850 2550,4850 ; 5900,2400 8600,2400 8600,5600 5900,5600 5900,2400 ; 6050,2550 6050,2950 6150,2950 6150,2550 6050,2550 ; 6325,2425 6325,3175 6475,3175 6475,2425 6325,2425 ; 6625,2425 6650,2425 6775,2425 6775,3175 6625,3175 6625,2425 ; 7950,4950 7950,5050 8450,5050 8450,4950 7950,4950

## Text inside footprints (layer, text, board x,y; h text height)
C1: Top Overlay "+" at 10420.15,5170.99 h59.06
L1: Top Overlay "00" at -517,4433 h150